# Altium PCB PCB1.PcbDoc (part 1 of 3)
Units mm, origin at the board's own origin, x right, y up, seen from the top; angles counter-clockwise.
Board outline 201 x 61 mm, 2 copper layers (Top Layer, Bottom Layer); 203 components, 113 nets, 551 pads, 592 vias.
Unrouted connection lines stored in the file: 16.
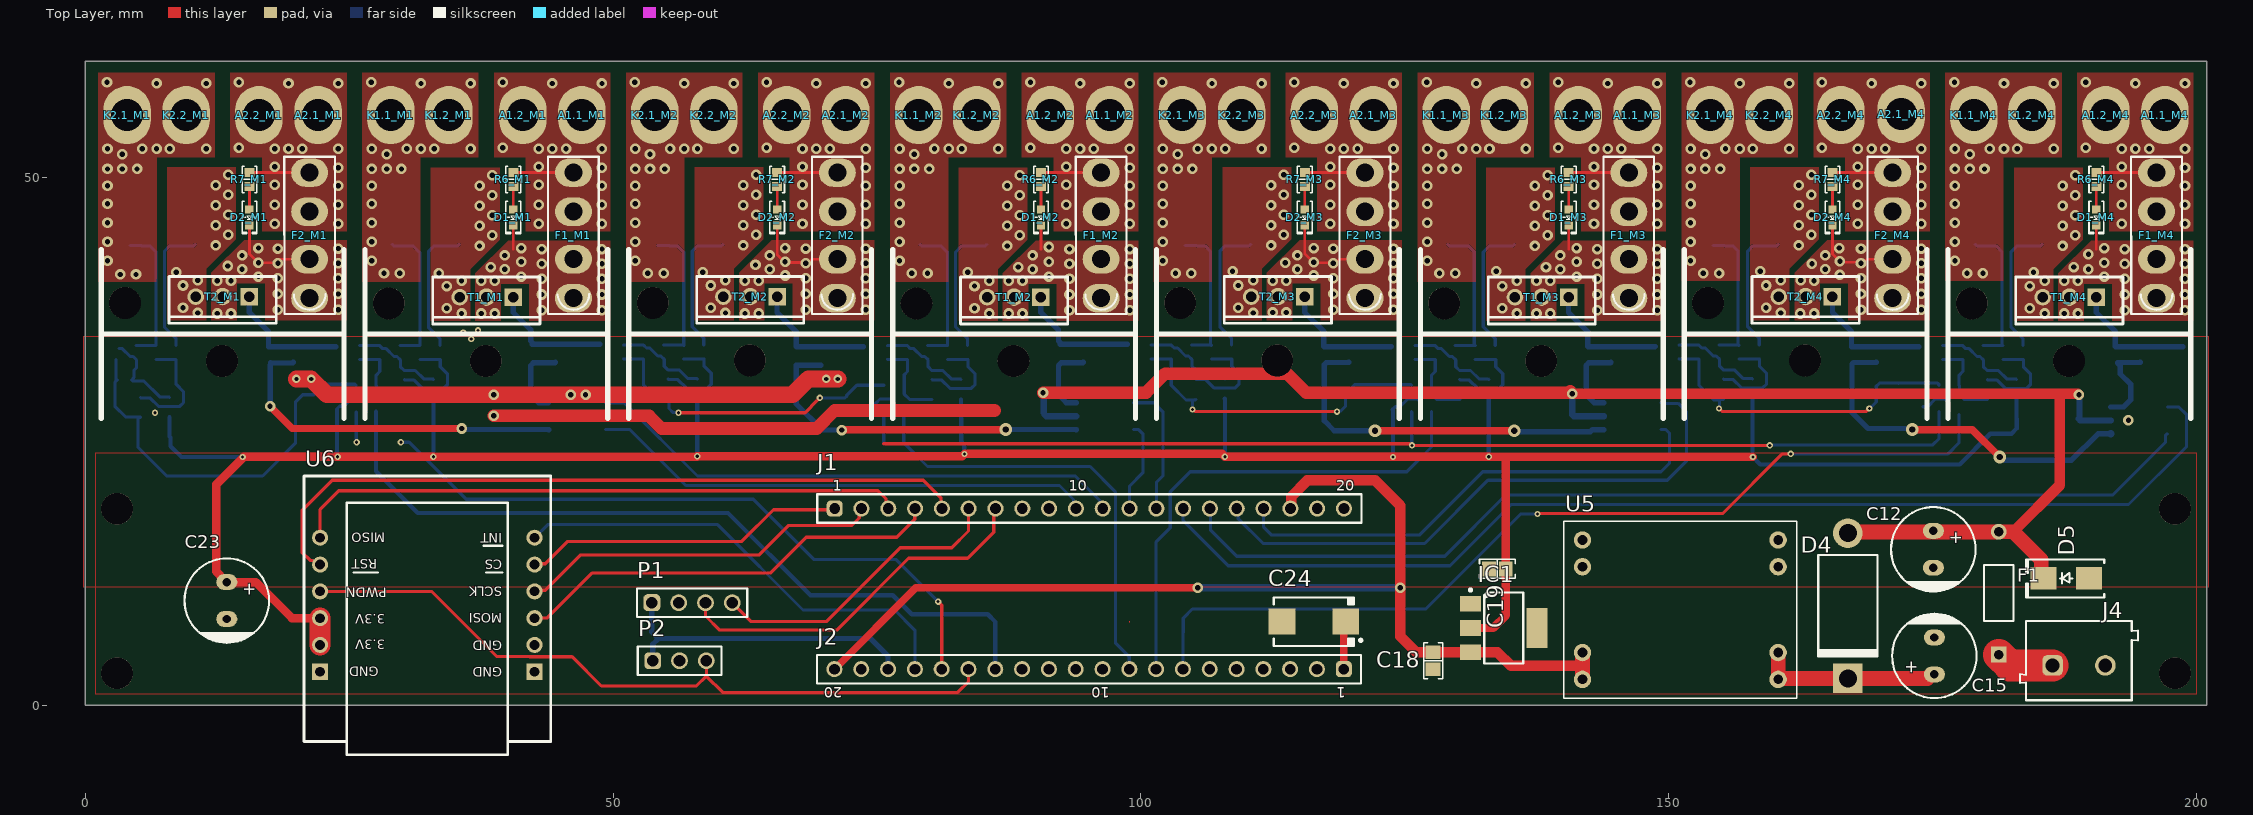
[diagram p0: Top Layer view]
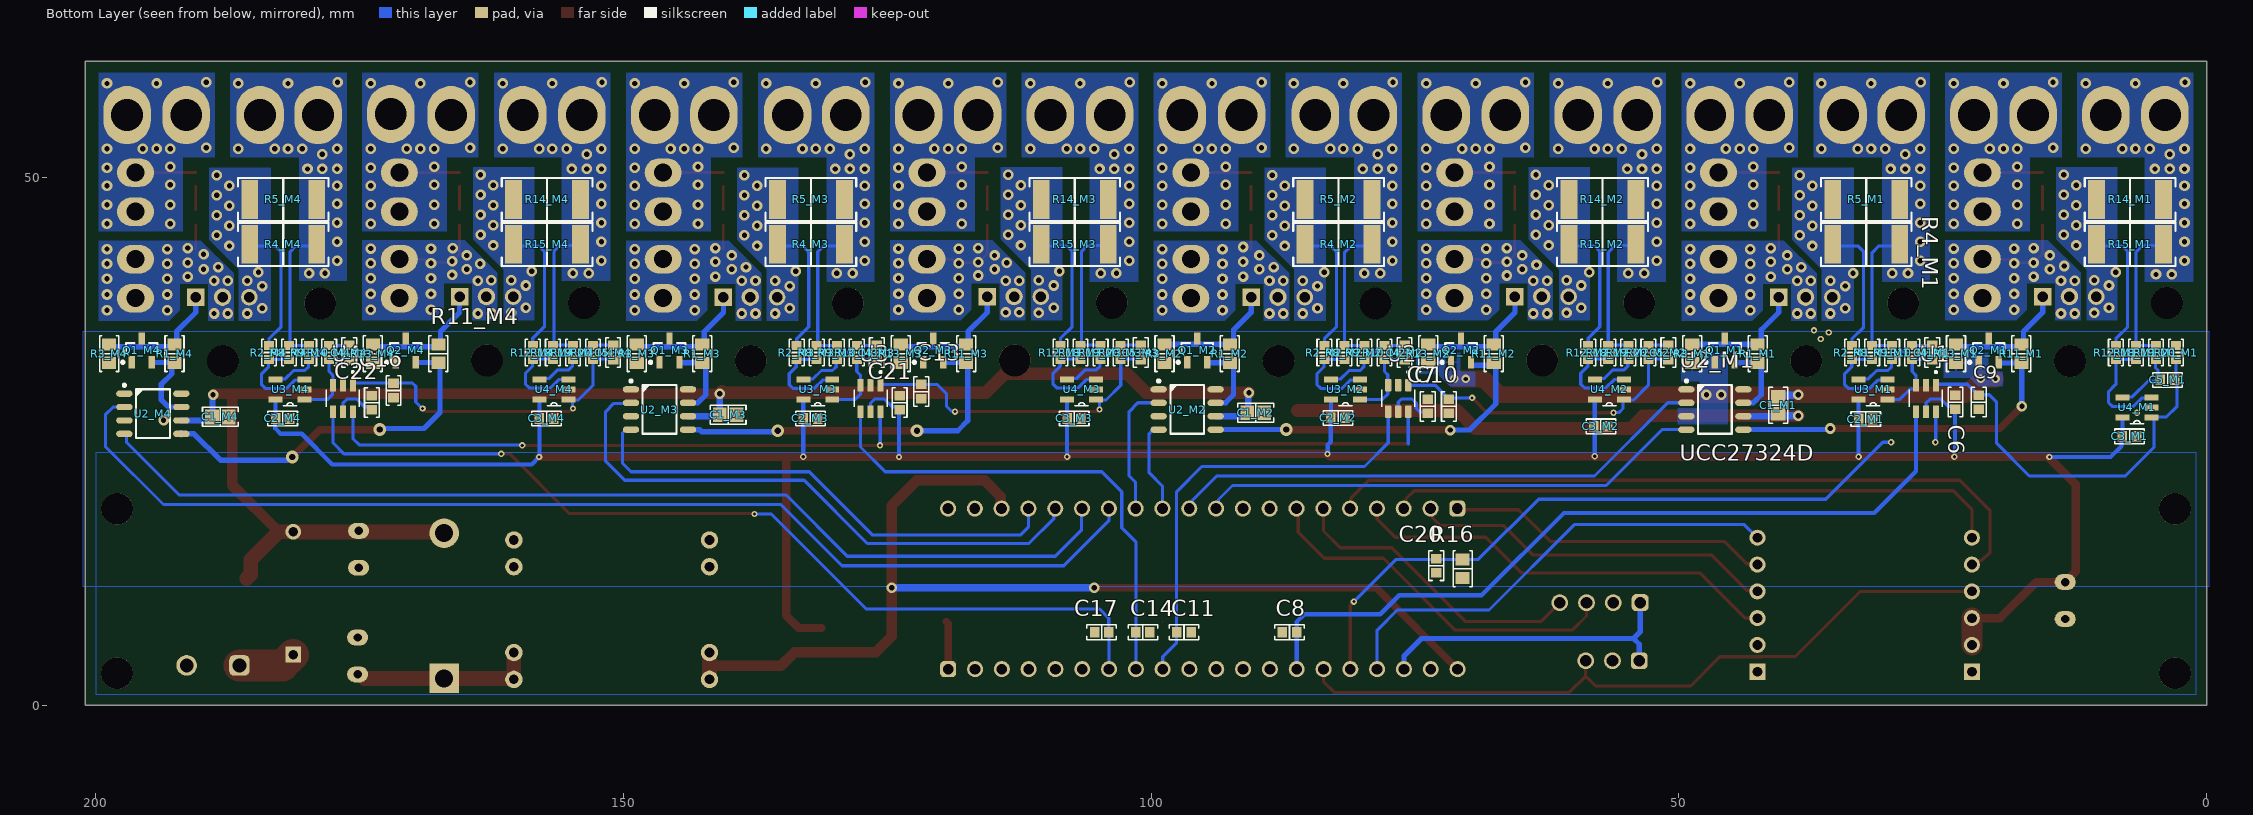
[diagram p1: Bottom Layer view, seen from below]
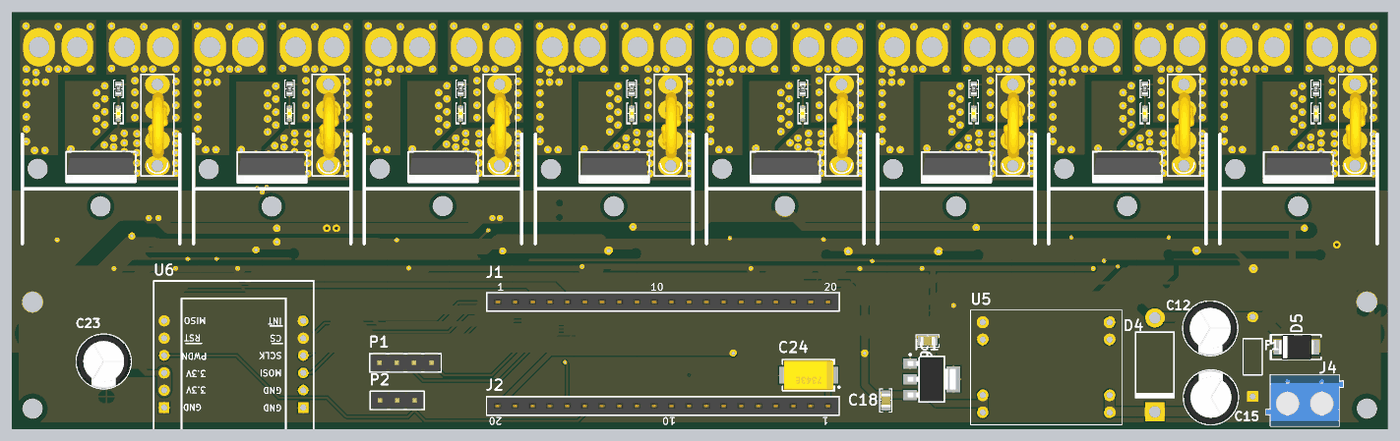
[diagram p3: 3D render of the assembled board from above, using the file's embedded part models]
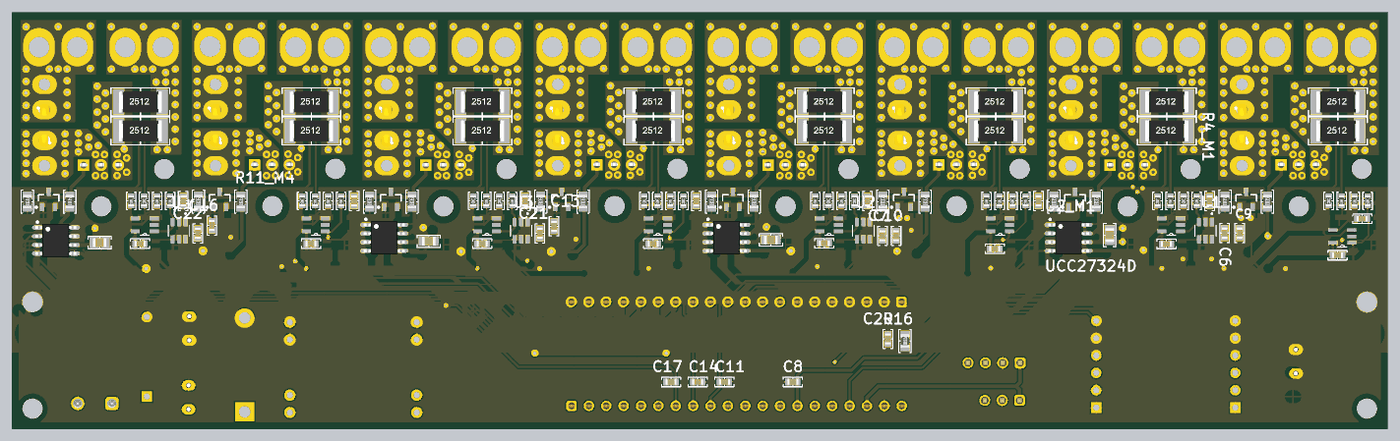
[diagram p4: 3D render of the assembled board from below, using the file's embedded part models]

## Layer stack, top to bottom
Top Solder: solder mask 0.0102, Solder Resist, Dk 3.5
Top Layer: signal copper 0.0356
Dielectric 1: dielectric 0.32, FR-4, Dk 4.8
Bottom Layer: signal copper 0.0356
Bottom Solder: solder mask 0.0102, Solder Resist, Dk 3.5

## Board outline
0,61 201,61 201,0 0,0

## Design rules (kind name [scope] priority, off if disabled: settings)
AcuteAngle [All] p1: minimum=3.50000000000000E+0001 checktracksonly=FALSE
AssemblyTestPointUsage [All] p1: valid=2
BoardOutlineClearance "BoardOutlineClearance 1" [All] p1: gap=0.25 ignorepadtopadclearanceinfootprint=FALSE except(0: Arc-SplitContinuation Track-SplitContinuation SMDPad-SplitContinuation THPad-SplitContinuation Via-SplitContinuation Fill-SplitContinuation Poly-SplitContinuation Region-SplitContinuation Text-SplitContinuation) // Milling
BoardOutlineClearance "BoardOutlineClearance 2" [All] p2: gap=0.4 ignorepadtopadclearanceinfootprint=FALSE except(0: Arc-SplitContinuation Track-SplitContinuation SMDPad-SplitContinuation THPad-SplitContinuation Via-SplitContinuation Fill-SplitContinuation Poly-SplitContinuation Region-SplitContinuation Text-SplitContinuation) // V-Cut
Clearance Clearance_hole7 [(ObjectKind = 'Pad') And (Name = 'Free-7')] p1: gap=0.254 ignorepadtopadclearanceinfootprint=FALSE except(0: Arc-Hole Track-Hole SMDPad-Hole THPad-Hole Via-Hole Fill-Hole Region-Hole Text-Hole; 0.5: Poly-Poly Poly-Region Poly-Text Poly-Hole)
Clearance Clearance_hole8 [(ObjectKind = 'Pad') And (Name = 'Free-8')] p2: gap=0.254 ignorepadtopadclearanceinfootprint=FALSE except(0: Arc-Hole Track-Hole SMDPad-Hole THPad-Hole Via-Hole Fill-Hole Region-Hole Text-Hole; 0.7: Poly-Poly Poly-Region Poly-Text Poly-Hole)
Clearance [All] p3: gap=0.2 ignorepadtopadclearanceinfootprint=FALSE except(0.25: Arc-Hole Track-Hole SMDPad-Hole THPad-Hole Via-Hole Fill-Hole Poly-Hole Region-Hole Text-Hole)
DiffPairsRouting "DiffPairsRouting 1 Oz" [All] p1: maxlimit=0.254 minlimit=0.2 mostfreqgap=0.254 toplayer_minwidth=0.2 toplayer_maxwidth=0.381 toplayer_prefwidth=0.381 bottomlayer_minwidth=0.2 bottomlayer_maxwidth=0.381 bottomlayer_prefwidth=0.381 maxuncoupledlength=12.7
DiffPairsRouting "DiffPairsRouting 1/2 Oz" [All] p2 off: maxlimit=0.254 minlimit=0.1 mostfreqgap=0.254 toplayer_minwidth=0.1 toplayer_maxwidth=0.381 toplayer_prefwidth=0.381 bottomlayer_minwidth=0.1 bottomlayer_maxwidth=0.381 bottomlayer_prefwidth=0.381 maxuncoupledlength=12.7
FabricationTestPointUsage [All] p1: valid=2 allowmultiple=FALSE
HoleSize "Minimum HoleSize" [IsPad] p1: absolutevalues=TRUE maxlimit=5.9 minlimit=0.6 maxpercent=80.000 minpercent=20.000
HoleSize "Minimum HoleSize VIA 1" [IsVia] p2: absolutevalues=TRUE maxlimit=5.9 minlimit=0.3 maxpercent=80.000 minpercent=20.000 // Standart
HoleSize "Minimum HoleSize VIA 2" [IsVia] p3: absolutevalues=TRUE maxlimit=5.9 minlimit=0.2 maxpercent=80.000 minpercent=20.000 // Advance
HoleToHoleClearance Hole2HoleClearance [All] p1: gap=0.25 allowstackedmicrovias=FALSE
MinimumAnnularRing "Minimum AR VIA Standart" [IsVia] p1: minimumring=0.15
MinimumAnnularRing "Minimum AR PAD Standart" [IsPAD] p2: minimumring=0.2
MinimumAnnularRing "Minimum AR VIA Advance" [IsVia] p3: minimumring=0.1
MinimumAnnularRing "Minimum AR PAD Advance" [IsPAD] p4: minimumring=0.15
MinimumSolderMaskSliver "SolderMask Bridge Standart" [All] p1: minsoldermaskwidth=0.15 // All Masks
MinimumSolderMaskSliver "SolderMask Bridge Advance" [All] p2: minsoldermaskwidth=0.1 // Mask LDI
PlaneClearance "PlaneClearance 3 Oz" [All] p1 off: clearance=0.35
PlaneClearance "PlaneClearance 2 Oz" [All] p2 off: clearance=0.3
PlaneClearance "PlaneClearance 1 Oz" [All] p3: clearance=0.2
PlaneClearance "PlaneClearance-1 1/2 Oz" [All] p4 off: clearance=0.2 // Standart
PlaneClearance "PlaneClearance-2 1/2 Oz" [All] p5 off: clearance=0.15 // Advance
PlaneConnect "TermalConnect 3 Oz" [All] p1 off: planeconnectstyle=Relief reliefexpansion=0.2 reliefentries=4 reliefconductorwidth=0.35 reliefairgap=0.35 // Standart
PlaneConnect "TermalConnect 2 Oz" [All] p2 off: planeconnectstyle=Relief reliefexpansion=0.2 reliefentries=4 reliefconductorwidth=0.3 reliefairgap=0.3 // Standart
PlaneConnect "TermalConnect-1 1 Oz" [All] p3: planeconnectstyle=Relief reliefexpansion=0.2 reliefentries=4 reliefconductorwidth=0.2 reliefairgap=0.2 // Standart
PlaneConnect "TermalConnect-2 1 Oz" [All] p4 off: pad.planeconnectstyle=Relief pad.reliefexpansion=0.15 pad.reliefentries=4 pad.reliefconductorwidth=0.2 pad.reliefairgap=0.2 via.planeconnectstyle=Direct via.reliefexpansion=0.15 via.reliefentries=4 via.reliefconductorwidth=0.15 via.reliefairgap=0.15 // Advance
PlaneConnect "TermalConnect-1 1/2 Oz" [All] p5 off: planeconnectstyle=Relief reliefexpansion=0.2 reliefentries=4 reliefconductorwidth=0.2 reliefairgap=0.2 // Standart
PlaneConnect "TermalConnect-2 1/2 Oz" [All] p6 off: pad.planeconnectstyle=Relief pad.reliefexpansion=0.15 pad.reliefentries=4 pad.reliefconductorwidth=0.15 pad.reliefairgap=0.15 via.planeconnectstyle=Direct via.reliefexpansion=0.15 via.reliefentries=4 via.reliefconductorwidth=0.15 via.reliefairgap=0.15 // Advance
PolygonConnect "PolygonConnect 3 Oz" [All] p1 off: thpad.connectstyle=Relief thpad.reliefconductorwidth=0.35 thpad.reliefentries=4 thpad.polygonreliefangle="90 Angle" thpad.airgapwidth=0.35 smdpad.connectstyle=Relief smdpad.reliefconductorwidth=0.35 smdpad.reliefentries=4 smdpad.polygonreliefangle="90 Angle" smdpad.airgapwidth=0.35 via.connectstyle=Direct via.reliefconductorwidth=0.254 via.reliefentries=4 via.polygonreliefangle="90 Angle" via.airgapwidth=0.254
PolygonConnect "PolygonConnect 2 Oz" [All] p2 off: thpad.connectstyle=Relief thpad.reliefconductorwidth=0.3 thpad.reliefentries=4 thpad.polygonreliefangle="90 Angle" thpad.airgapwidth=0.3 smdpad.connectstyle=Relief smdpad.reliefconductorwidth=0.3 smdpad.reliefentries=4 smdpad.polygonreliefangle="90 Angle" smdpad.airgapwidth=0.3 via.connectstyle=Direct via.reliefconductorwidth=0.254 via.reliefentries=4 via.polygonreliefangle="90 Angle" via.airgapwidth=0.254
PolygonConnect "PolygonConnect-1 1 Oz" [All] p3: thpad.connectstyle=Relief thpad.reliefconductorwidth=0.2 thpad.reliefentries=4 thpad.polygonreliefangle="90 Angle" thpad.airgapwidth=0.2 smdpad.connectstyle=Relief smdpad.reliefconductorwidth=0.2 smdpad.reliefentries=4 smdpad.polygonreliefangle="90 Angle" smdpad.airgapwidth=0.2 via.connectstyle=Direct via.reliefconductorwidth=0.254 via.reliefentries=4 via.polygonreliefangle="90 Angle" via.airgapwidth=0.254 // Standart
PolygonConnect "PolygonConnect-2 1 Oz" [All] p4 off: thpad.connectstyle=Relief thpad.reliefconductorwidth=0.15 thpad.reliefentries=4 thpad.polygonreliefangle="90 Angle" thpad.airgapwidth=0.15 smdpad.connectstyle=Relief smdpad.reliefconductorwidth=0.15 smdpad.reliefentries=4 smdpad.polygonreliefangle="90 Angle" smdpad.airgapwidth=0.15 via.connectstyle=Direct via.reliefconductorwidth=0.254 via.reliefentries=4 via.polygonreliefangle="90 Angle" via.airgapwidth=0.254 // Advance
PolygonConnect "PolygonConnect-1 1/2 Oz" [All] p5 off: thpad.connectstyle=Relief thpad.reliefconductorwidth=0.15 thpad.reliefentries=4 thpad.polygonreliefangle="90 Angle" thpad.airgapwidth=0.2 smdpad.connectstyle=Relief smdpad.reliefconductorwidth=0.2 smdpad.reliefentries=4 smdpad.polygonreliefangle="90 Angle" smdpad.airgapwidth=0.2 via.connectstyle=Direct via.reliefconductorwidth=0.254 via.reliefentries=4 via.polygonreliefangle="90 Angle" via.airgapwidth=0.254 // Standart
PolygonConnect "PolygonConnect-2 1/2 Oz" [All] p6 off: thpad.connectstyle=Relief thpad.reliefconductorwidth=0.125 thpad.reliefentries=4 thpad.polygonreliefangle="90 Angle" thpad.airgapwidth=0.15 smdpad.connectstyle=Relief smdpad.reliefconductorwidth=0.125 smdpad.reliefentries=4 smdpad.polygonreliefangle="90 Angle" smdpad.airgapwidth=0.15 via.connectstyle=Direct via.reliefconductorwidth=0.254 via.reliefentries=4 via.polygonreliefangle="90 Angle" via.airgapwidth=0.254 // Advance
RoutingCorners [All] p1 off: cornerstyle=45-Degree minsetback=2.54 maxsetback=2.54
RoutingVias [All] p1: holewidth=0.3 width=0.6 viastyle="Through Hole" minholewidth=0.2 minwidth=0.4 maxholewidth=5.9 maxwidth=6.4
SilkToSilkClearance Silk2SilkClearance [All] p1 off: silktosilkclearance=0.15
SilkToSolderMaskClearance Silk2SolderMaskClearance [IsPad] p1 off: minsilkscreentomaskgap=0.15 clearancetoexposedcopper=TRUE
SolderMaskExpansion SolderMaskExpansion-1 [All] p1: expansion=0.05 istentingtop=FALSE // Standart
SolderMaskExpansion "SolderMaskExpansion LDI" [All] p2: expansion=0.025 istentingtop=FALSE // Advance
Width "Width 3 Oz" [All] p1 off: maxlimit=10 minlimit=0.35 preferedwidth=0.4 checkconnectedcopper=TRUE
Width "Width 2 Oz" [All] p2 off: maxlimit=10 minlimit=0.3 preferedwidth=0.35 minimp=50.000000 maximp=50.000000 favimp=50.000000 checkconnectedcopper=TRUE
Width "Width 1 Oz" [All] p3: maxlimit=10 minlimit=0.15 preferedwidth=0.2 checkconnectedcopper=TRUE
Width "Width 1/2 Oz" [All] p4 off: maxlimit=10 minlimit=0.1 preferedwidth=0.125 checkconnectedcopper=TRUE
19 further rules are at their usual default settings.

## Classes and differential pairs
component class Sheet1: C6 C7 C8 C9 C10 C11 C12 C13 C14 C15 C16 C17 C18 C19 C20 C21 C22 C23 C24 D4 D5 F1 IC1 J1 J2 J4 P1 P2 R16 "STM32F4x1CxU6 Part" U1 U2 U3 U4 U5 U6
component class M4: A1.1_M4 A1.2_M4 A2.1_M4 A2.2_M4 C1_M4 C2_M4 C3_M4 C4_M4 C5_M4 D1_M4 D2_M4 F1_M4 F2_M4 K1.1_M4 K1.2_M4 K2.1_M4 K2.2_M4 Q1_M4 Q2_M4 R1_M4 R2_M4 R3_M4 R4_M4 R5_M4 R6_M4 R7_M4 R8_M4 R9_M4 R10_M4 R11_M4 R12_M4 R13_M4 R14_M4 R15_M4 R18_M4 R19_M4 R20_M4 T1_M4 T2_M4 U2_M4 U3_M4 U4_M4
component class M3: A1.1_M3 A1.2_M3 A2.1_M3 A2.2_M3 C1_M3 C2_M3 C3_M3 C4_M3 C5_M3 D1_M3 D2_M3 F1_M3 F2_M3 K1.1_M3 K1.2_M3 K2.1_M3 K2.2_M3 Q1_M3 Q2_M3 R1_M3 R2_M3 R3_M3 R4_M3 R5_M3 R6_M3 R7_M3 R8_M3 R9_M3 R10_M3 R11_M3 R12_M3 R13_M3 R14_M3 R15_M3 R18_M3 R19_M3 R20_M3 T1_M3 T2_M3 U2_M3 U3_M3 U4_M3
component class M2: A1.1_M2 A1.2_M2 A2.1_M2 A2.2_M2 C1_M2 C2_M2 C3_M2 C4_M2 C5_M2 D1_M2 D2_M2 F1_M2 F2_M2 K1.1_M2 K1.2_M2 K2.1_M2 K2.2_M2 Q1_M2 Q2_M2 R1_M2 R2_M2 R3_M2 R4_M2 R5_M2 R6_M2 R7_M2 R8_M2 R9_M2 R10_M2 R11_M2 R12_M2 R13_M2 R14_M2 R15_M2 R18_M2 R19_M2 R20_M2 T1_M2 T2_M2 U2_M2 U3_M2 U4_M2
component class M1: A1.1_M1 A1.2_M1 A2.1_M1 A2.2_M1 C1_M1 C2_M1 C3_M1 C4_M1 C5_M1 D1_M1 D2_M1 F1_M1 F2_M1 K1.1_M1 K1.2_M1 K2.1_M1 K2.2_M1 Q1_M1 Q2_M1 R1_M1 R2_M1 R3_M1 R4_M1 R5_M1 R6_M1 R7_M1 R8_M1 R9_M1 R10_M1 R11_M1 R12_M1 R13_M1 R14_M1 R15_M1 R18_M1 R19_M1 R20_M1 T1_M1 T2_M1 U2_M1 U3_M1 U4_M1
channel class Sheet2: M1 M2 M3 M4

## Components (designator, comment, footprint, x,y, rotation, side; value= is the part's Value field where it differs from the comment)
A1.1_M1 "Plated Hole" MTG240_400#1 47.05,55.9 r0 top (schematic designator A1.1)
A1.1_M2 "Plated Hole" MTG240_400#2 97.05,55.15 r0 top (schematic designator A1.1)
A1.1_M3 "Plated Hole" MTG240_400#2 147.05,55.15 r0 top (schematic designator A1.1)
A1.1_M4 "Plated Hole" MTG240_400#2 197.05,55.15 r0 top (schematic designator A1.1)
A1.2_M1 "Plated Hole" MTG240_400#1 41.45,55.9 r0 top (schematic designator A1.2)
A1.2_M2 "Plated Hole" MTG240_400#2 91.45,55.15 r0 top (schematic designator A1.2)
A1.2_M3 "Plated Hole" MTG240_400#2 141.45,55.15 r0 top (schematic designator A1.2)
A1.2_M4 "Plated Hole" MTG240_400#2 191.45,55.15 r0 top (schematic designator A1.2)
A2.1_M1 "Plated Hole" MTG240_400#1 22.05,55.9 r0 top (schematic designator A2.1)
A2.1_M2 "Plated Hole" MTG240_400#2 72.05,55.15 r0 top (schematic designator A2.1)
A2.1_M3 "Plated Hole" MTG240_400#2 122.05,55.15 r0 top (schematic designator A2.1)
A2.1_M4 "Plated Hole" MTG240_400#2 172.05,55.25 r0 top (schematic designator A2.1)
A2.2_M1 "Plated Hole" MTG240_400#1 16.45,55.9 r0 top (schematic designator A2.2)
A2.2_M2 "Plated Hole" MTG240_400#2 66.45,55.15 r0 top (schematic designator A2.2)
A2.2_M3 "Plated Hole" MTG240_400#2 116.45,55.15 r0 top (schematic designator A2.2)
A2.2_M4 "Plated Hole" MTG240_400#2 166.35,55.15 r0 top (schematic designator A2.2)
C1_M1 "2.2 µF" "CAP 0805_2012" 40.6,28.4 r270 bottom (schematic designator C1)
C1_M2 "2.2 µF" "CAP 0805_2012" 90.1,27.7 r0 bottom (schematic designator C1)
C1_M3 "2.2 µF" "CAP 0805_2012" 140.1,27.5 r0 bottom (schematic designator C1)
C1_M4 "2.2 µF" "CAP 0805_2012" 188.2,27.3 r0 bottom (schematic designator C1)
C2_M1 "1000 pF" "CAP 0603_1608" 32.3,27.1 r0 bottom (schematic designator C2)
C2_M2 "1000 pF" "CAP 0603_1608" 82.3,27.2 r0 bottom (schematic designator C2)
C2_M3 "1000 pF" "CAP 0603_1608" 132.3,27.15 r0 bottom (schematic designator C2)
C2_M4 "1000 pF" "CAP 0603_1608" 182.3,27.15 r0 bottom (schematic designator C2)
C3_M1 "1000 pF" "CAP 0603_1608" 7.3,25.45 r0 bottom (schematic designator C3)
C3_M2 "1000 pF" "CAP 0603_1608" 57.4,26.4 r0 bottom (schematic designator C3)
C3_M3 "1000 pF" "CAP 0603_1608" 107.3,27.15 r0 bottom (schematic designator C3)
C3_M4 "1000 pF" "CAP 0603_1608" 157.3,27.15 r0 bottom (schematic designator C3)
C4_M1 "6800 pF" "CAP 0603_1608" 26,33.4 r270 bottom (schematic designator C4)
C4_M2 "6800 pF" "CAP 0603_1608" 76,33.4 r270 bottom (schematic designator C4)
C4_M3 "6800 pF" "CAP 0603_1608" 126,33.4 r270 bottom (schematic designator C4)
C4_M4 "6800 pF" "CAP 0603_1608" 176,33.4 r270 bottom (schematic designator C4)
C5_M1 "6800 pF" "CAP 0603_1608" 3.7,30.8 r180 bottom (schematic designator C5)
C5_M2 "6800 pF" "CAP 0603_1608" 51,33.4 r270 bottom (schematic designator C5)
C5_M3 "6800 pF" "CAP 0603_1608" 101,33.4 r270 bottom (schematic designator C5)
C5_M4 "6800 pF" "CAP 0603_1608" 151,33.4 r270 bottom (schematic designator C5)
C6 "1000 pF" "CAP 0603_1608" 23.8,28.7 r270 bottom
C7 "1000 pF" "CAP 0603_1608" 73.8,28.3 r270 bottom
C8 "0.1 µF" "CAP 0603_1608" 86.9,6.9 r0 bottom
C9 "0.1 µF" "CAP 0603_1608" 21.6,28.7 r270 bottom
C10 "0.1 µF" "CAP 0603_1608" 71.8,28.3 r270 bottom
C11 "0.1 µF" "CAP 0603_1608" 96.9,6.9 r180 bottom
C12 "220 µF" "CAP AL TH D8 L3.5 H12.5" 175.1,14.75 r270 top
C13 "0.1 µF" "CAP 0603_1608" 121.8,29.7 r270 bottom
C14 "0.1 µF" "CAP 0603_1608" 100.8,6.9 r0 bottom
C15 "220 µF" "CAP AL TH D8 L3.5 H12.5" 175.2,4.65 r90 top
C16 "0.1 µF" "CAP 0603_1608" 171.8,29.8 r90 bottom
C17 "0.1 µF" "CAP 0603_1608" 104.7,6.9 r180 bottom
C18 "1 µF" "CAP 0805_2012" 127.7,4.2 r90 top
C19 "4.7µF" "CAP 0805_2012" 133.8,12.9 r0 top
C20 "0.1 µF" "CAP 0603_1608" 73,13.2 r270 bottom
C21 "1000 pF" "CAP 0603_1608" 123.85,28.65 r270 bottom
C22 "1000 pF" "CAP 0603_1608" 173.85,28.65 r270 bottom
C23 "470 µF" "CAP AL TH D8 L3.5 H12.5" 13.4,9.9 r270 top
C24 "330µF" "CAP POL 2917_7343" 116.4,7.9 r180 top
D1_M1 "Yellow" "LED 0603_1608 YELLOW" 40.55,46.2 r270 top (schematic designator D1)
D1_M2 "Yellow" "LED 0603_1608 YELLOW" 90.55,46.2 r270 top (schematic designator D1)
D1_M3 "Yellow" "LED 0603_1608 YELLOW" 140.55,46.2 r270 top (schematic designator D1)
D1_M4 "Yellow" "LED 0603_1608 YELLOW" 190.55,46.2 r270 top (schematic designator D1)
D2_M1 "Yellow" "LED 0603_1608 YELLOW" 15.55,46.2 r270 top (schematic designator D2)
D2_M2 "Yellow" "LED 0603_1608 YELLOW" 65.55,46.2 r270 top (schematic designator D2)
D2_M3 "Yellow" "LED 0603_1608 YELLOW" 115.55,46.2 r270 top (schematic designator D2)
D2_M4 "Yellow" "LED 0603_1608 YELLOW" 165.55,46.2 r270 top (schematic designator D2)
D4 "Diode 1N5400" DO-201AD 167,9.4 r270 top
D5 "SMBJ120A" "DO214AA SMB" 187.7,12 r180 top
F1 "Fuse 1" PIN-W2/E2.8 181.3,10.6 r90 top
F1_M1 "Value" "FUSR_LITTELFUSE_RHEF100 - duplicate" 46.25,44.5 r90 top (schematic designator F1)
F1_M2 "Value" "FUSR_LITTELFUSE_RHEF100 - duplicate" 96.25,44.5 r90 top (schematic designator F1)
F1_M3 "Value" "FUSR_LITTELFUSE_RHEF100 - duplicate" 146.25,44.5 r90 top (schematic designator F1)
F1_M4 "Value" "FUSR_LITTELFUSE_RHEF100 - duplicate" 196.25,44.5 r90 top (schematic designator F1)
F2_M1 "Value" "FUSR_LITTELFUSE_RHEF100 - duplicate" 21.25,44.5 r90 top (schematic designator F2)
F2_M2 "Value" "FUSR_LITTELFUSE_RHEF100 - duplicate" 71.25,44.5 r90 top (schematic designator F2)
F2_M3 "Value" "FUSR_LITTELFUSE_RHEF100 - duplicate" 121.25,44.5 r90 top (schematic designator F2)
F2_M4 "Value" "FUSR_LITTELFUSE_RHEF100 - duplicate" 171.25,44.5 r90 top (schematic designator F2)
IC1 "LDL1117S33R" "ST SOT-223" 134.4,7.3 r0 top
J1 "61302011821" 61302011821 95.13,18.62 r0 top
J2 "61302011821" 61302011821 95.11,3.4 r180 top
J4 "691102710002" 691102710002 188.9,4.2 r0 top
K1.1_M1 "Plated Hole" MTG240_400#1 28.95,55.9 r0 top (schematic designator K1.1)
K1.1_M2 "Plated Hole" MTG240_400#2 78.95,55.15 r0 top (schematic designator K1.1)
K1.1_M3 "Plated Hole" MTG240_400#2 128.95,55.15 r0 top (schematic designator K1.1)
K1.1_M4 "Plated Hole" MTG240_400#2 178.95,55.15 r0 top (schematic designator K1.1)
K1.2_M1 "Plated Hole" MTG240_400#1 34.45,55.9 r0 top (schematic designator K1.2)
K1.2_M2 "Plated Hole" MTG240_400#2 84.45,55.15 r0 top (schematic designator K1.2)
K1.2_M3 "Plated Hole" MTG240_400#2 134.45,55.15 r0 top (schematic designator K1.2)
K1.2_M4 "Plated Hole" MTG240_400#2 184.45,55.15 r0 top (schematic designator K1.2)
K2.1_M1 "Plated Hole" MTG240_400#1 3.95,55.9 r0 top (schematic designator K2.1)
K2.1_M2 "Plated Hole" MTG240_400#2 53.95,55.15 r0 top (schematic designator K2.1)
K2.1_M3 "Plated Hole" MTG240_400#2 103.95,55.15 r0 top (schematic designator K2.1)
K2.1_M4 "Plated Hole" MTG240_400#2 153.95,55.15 r0 top (schematic designator K2.1)
K2.2_M1 "Plated Hole" MTG240_400#1 9.55,55.9 r0 top (schematic designator K2.2)
K2.2_M2 "Plated Hole" MTG240_400#2 59.55,55.15 r0 top (schematic designator K2.2)
K2.2_M3 "Plated Hole" MTG240_400#2 109.55,55.15 r0 top (schematic designator K2.2)
K2.2_M4 "Plated Hole" MTG240_400#2 159.55,55.15 r0 top (schematic designator K2.2)
P1 "61300411121" 61300411121 57.49,9.7 r0 top
P2 "61300311121" 61300311121 56.3,4.2 r0 top
Q1_M1 "FMMT718TA" SOT-23B_N 45.65,33.6 r90 bottom (schematic designator Q1)
Q1_M2 "FMMT718TA" SOT-23B_N 95.65,33.6 r90 bottom (schematic designator Q1)
Q1_M3 "FMMT718TA" SOT-23B_N 145.65,33.6 r90 bottom (schematic designator Q1)
Q1_M4 "FMMT718TA" SOT-23B_N 195.65,33.6 r90 bottom (schematic designator Q1)
Q2_M1 "FMMT718TA" SOT-23B_N 20.65,33.6 r90 bottom (schematic designator Q2)
Q2_M2 "FMMT718TA" SOT-23B_N 70.65,33.6 r90 bottom (schematic designator Q2)
Q2_M3 "FMMT718TA" SOT-23B_N 120.65,33.6 r90 bottom (schematic designator Q2)
Q2_M4 "FMMT718TA" SOT-23B_N 170.65,33.6 r90 bottom (schematic designator Q2)
R1_M1 "3 Ohms" "RES 0805_2012" 42.55,33.3 r90 bottom (schematic designator R1)
R1_M2 "3 Ohms" "RES 0805_2012" 92.55,33.3 r90 bottom (schematic designator R1)
R1_M3 "3 Ohms" "RES 0805_2012" 142.55,33.3 r90 bottom (schematic designator R1)
R1_M4 "3 Ohms" "RES 0805_2012" 192.55,33.3 r90 bottom (schematic designator R1)
R2_M1 "5.1 kOhms" "RES 0603_1608" 33.6,33.4 r270 bottom (schematic designator R2)
R2_M2 "5.1 kOhms" "RES 0603_1608" 83.6,33.4 r270 bottom (schematic designator R2)
R2_M3 "5.1 kOhms" "RES 0603_1608" 133.6,33.4 r270 bottom (schematic designator R2)
R2_M4 "5.1 kOhms" "RES 0603_1608" 183.6,33.4 r270 bottom (schematic designator R2)
R3_M1 "10 kOhms" "RES 0805_2012" 48.75,33.3 r90 bottom (schematic designator R3)
R3_M2 "10 kOhms" "RES 0805_2012" 98.75,33.3 r90 bottom (schematic designator R3)
R3_M3 "10 kOhms" "RES 0805_2012" 148.75,33.3 r90 bottom (schematic designator R3)
R3_M4 "10 kOhms" "RES 0805_2012" 198.75,33.3 r90 bottom (schematic designator R3)
R4_M1 "10 mOhms" "RES 2512_6432" 32.25,43.65 r180 bottom (schematic designator R4)
R4_M2 "10 mOhms" "RES 2512_6432" 82.25,43.65 r180 bottom (schematic designator R4)
R4_M3 "10 mOhms" "RES 2512_6432" 132.25,43.65 r180 bottom (schematic designator R4)
R4_M4 "10 mOhms" "RES 2512_6432" 182.25,43.65 r180 bottom (schematic designator R4)
R5_M1 "10 mOhms" "RES 2512_6432" 32.25,47.9 r180 bottom (schematic designator R5)
R5_M2 "10 mOhms" "RES 2512_6432" 82.25,47.9 r180 bottom (schematic designator R5)
R5_M3 "10 mOhms" "RES 2512_6432" 132.25,47.9 r180 bottom (schematic designator R5)
R5_M4 "10 mOhms" "RES 2512_6432" 182.25,47.9 r180 bottom (schematic designator R5)
R6_M1 "4.7 kOhms" "RES 0603_1608" 40.55,49.8 r90 top (schematic designator R6)
R6_M2 "4.7 kOhms" "RES 0603_1608" 90.55,49.8 r90 top (schematic designator R6)
R6_M3 "4.7 kOhms" "RES 0603_1608" 140.55,49.8 r90 top (schematic designator R6)
R6_M4 "4.7 kOhms" "RES 0603_1608" 190.55,49.8 r90 top (schematic designator R6)
R7_M1 "4.7 kOhms" "RES 0603_1608" 15.55,49.8 r90 top (schematic designator R7)
R7_M2 "4.7 kOhms" "RES 0603_1608" 65.55,49.8 r90 top (schematic designator R7)
R7_M3 "4.7 kOhms" "RES 0603_1608" 115.55,49.8 r90 top (schematic designator R7)
R7_M4 "4.7 kOhms" "RES 0603_1608" 165.55,49.8 r90 top (schematic designator R7)
R8_M1 "249 kOhms" "RES 0603_1608" 31.7,33.4 r270 bottom (schematic designator R8)
R8_M2 "249 kOhms" "RES 0603_1608" 81.7,33.4 r270 bottom (schematic designator R8)
R8_M3 "249 kOhms" "RES 0603_1608" 131.7,33.4 r270 bottom (schematic designator R8)
R8_M4 "249 kOhms" "RES 0603_1608" 181.7,33.4 r270 bottom (schematic designator R8)
R9_M1 "5.1 kOhms" "RES 0603_1608" 29.8,33.4 r270 bottom (schematic designator R9)
R9_M2 "5.1 kOhms" "RES 0603_1608" 79.8,33.4 r270 bottom (schematic designator R9)
R9_M3 "5.1 kOhms" "RES 0603_1608" 129.8,33.4 r270 bottom (schematic designator R9)
R9_M4 "5.1 kOhms" "RES 0603_1608" 179.8,33.4 r270 bottom (schematic designator R9)
R10_M1 "249 kOhms" "RES 0603_1608" 27.9,33.4 r270 bottom (schematic designator R10)
R10_M2 "249 kOhms" "RES 0603_1608" 77.9,33.4 r270 bottom (schematic designator R10)
R10_M3 "249 kOhms" "RES 0603_1608" 127.9,33.4 r270 bottom (schematic designator R10)
R10_M4 "249 kOhms" "RES 0603_1608" 177.9,33.4 r270 bottom (schematic designator R10)
R11_M1 "3 Ohms" "RES 0805_2012" 17.55,33.3 r90 bottom (schematic designator R11)
R11_M2 "3 Ohms" "RES 0805_2012" 67.55,33.3 r90 bottom (schematic designator R11)
R11_M3 "3 Ohms" "RES 0805_2012" 117.55,33.3 r90 bottom (schematic designator R11)
R11_M4 "3 Ohms" "RES 0805_2012" 167.55,33.3 r90 bottom (schematic designator R11)
R12_M1 "5.1 kOhms" "RES 0603_1608" 8.6,33.4 r270 bottom (schematic designator R12)
R12_M2 "5.1 kOhms" "RES 0603_1608" 58.6,33.4 r270 bottom (schematic designator R12)
R12_M3 "5.1 kOhms" "RES 0603_1608" 108.6,33.4 r270 bottom (schematic designator R12)
R12_M4 "5.1 kOhms" "RES 0603_1608" 158.6,33.4 r270 bottom (schematic designator R12)
R13_M1 "10 kOhms" "RES 0805_2012" 23.75,33.3 r90 bottom (schematic designator R13)
R13_M2 "10 kOhms" "RES 0805_2012" 73.75,33.3 r90 bottom (schematic designator R13)
R13_M3 "10 kOhms" "RES 0805_2012" 123.75,33.3 r90 bottom (schematic designator R13)
R13_M4 "10 kOhms" "RES 0805_2012" 173.75,33.3 r90 bottom (schematic designator R13)
R14_M1 "10 mOhms" "RES 2512_6432" 7.25,47.9 r180 bottom (schematic designator R14)
R14_M2 "10 mOhms" "RES 2512_6432" 57.25,47.9 r180 bottom (schematic designator R14)
R14_M3 "10 mOhms" "RES 2512_6432" 107.25,47.9 r180 bottom (schematic designator R14)
R14_M4 "10 mOhms" "RES 2512_6432" 157.25,47.9 r180 bottom (schematic designator R14)
R15_M1 "10 mOhms" "RES 2512_6432" 7.25,43.65 r180 bottom (schematic designator R15)
R15_M2 "10 mOhms" "RES 2512_6432" 57.25,43.65 r180 bottom (schematic designator R15)
R15_M3 "10 mOhms" "RES 2512_6432" 107.25,43.65 r180 bottom (schematic designator R15)
R15_M4 "10 mOhms" "RES 2512_6432" 157.25,43.65 r180 bottom (schematic designator R15)
R16 "10 kOhms" "RES 0805_2012" 70.5,12.9 r90 bottom
R18_M1 "249 kOhms" "RES 0603_1608" 6.7,33.4 r270 bottom (schematic designator R18)
R18_M2 "249 kOhms" "RES 0603_1608" 56.7,33.4 r270 bottom (schematic designator R18)
R18_M3 "249 kOhms" "RES 0603_1608" 106.7,33.4 r270 bottom (schematic designator R18)
R18_M4 "249 kOhms" "RES 0603_1608" 156.7,33.4 r270 bottom (schematic designator R18)
R19_M1 "5.1 kOhms" "RES 0603_1608" 4.8,33.4 r270 bottom (schematic designator R19)
R19_M2 "5.1 kOhms" "RES 0603_1608" 54.8,33.4 r270 bottom (schematic designator R19)
R19_M3 "5.1 kOhms" "RES 0603_1608" 104.8,33.4 r270 bottom (schematic designator R19)
R19_M4 "5.1 kOhms" "RES 0603_1608" 154.8,33.4 r270 bottom (schematic designator R19)
R20_M1 "249 kOhms" "RES 0603_1608" 2.9,33.4 r270 bottom (schematic designator R20)
R20_M2 "249 kOhms" "RES 0603_1608" 52.9,33.4 r270 bottom (schematic designator R20)
R20_M3 "249 kOhms" "RES 0603_1608" 102.9,33.4 r270 bottom (schematic designator R20)
R20_M4 "249 kOhms" "RES 0603_1608" 152.9,33.4 r270 bottom (schematic designator R20)
T1_M1 "" TO-220 38,38.65 r180 top (schematic designator T1)
T1_M2 "" TO-220 88,38.65 r180 top (schematic designator T1)
T1_M3 "" TO-220 138,38.65 r180 top (schematic designator T1)
T1_M4 "" TO-220 188,38.65 r180 top (schematic designator T1)
T2_M1 "" TO-220 13,38.7 r180 top (schematic designator T2)
T2_M2 "" TO-220 63,38.7 r180 top (schematic designator T2)
T2_M3 "" TO-220 113,38.7 r180 top (schematic designator T2)
T2_M4 "" TO-220 163,38.7 r180 top (schematic designator T2)
U1 "SN74LVC1G3157DBVR" SOT95P280X145-6N 26.6,29.05 r270 bottom
U2 "SN74LVC1G3157DBVR" SOT95P280X145-6N 76.6,29.05 r270 bottom
U2_M1 "UCC27324D" 8-SOIC 46.6,28 r180 bottom (schematic designator U2)
U2_M2 "UCC27324D" 8-SOIC 96.6,28 r180 bottom (schematic designator U2)
U2_M3 "UCC27324D" 8-SOIC 146.6,28 r180 bottom (schematic designator U2)
U2_M4 "UCC27324D" 8-SOIC 194.6,27.6 r180 bottom (schematic designator U2)
U3 "SN74LVC1G3157DBVR" SOT95P280X145-6N 126.6,29.05 r270 bottom
U3_M1 "MCP606T-I/OT" SOT95P270X145-5N 31.6,29.9 r0 bottom (schematic designator U3)
U3_M2 "MCP606T-I/OT" SOT95P270X145-5N 81.6,29.9 r0 bottom (schematic designator U3)
U3_M3 "MCP606T-I/OT" SOT95P270X145-5N 131.6,29.9 r0 bottom (schematic designator U3)
U3_M4 "MCP606T-I/OT" SOT95P270X145-5N 181.6,29.9 r0 bottom (schematic designator U3)
U4 "SN74LVC1G3157DBVR" SOT95P280X145-6N 176.6,29.05 r270 bottom
U4_M1 "MCP606T-I/OT" SOT95P270X145-5N 6.6,28.2 r0 bottom (schematic designator U4)
U4_M2 "MCP606T-I/OT" SOT95P270X145-5N 56.6,29.9 r0 bottom (schematic designator U4)
U4_M3 "MCP606T-I/OT" SOT95P270X145-5N 106.6,29.9 r0 bottom (schematic designator U4)
U4_M4 "MCP606T-I/OT" SOT95P270X145-5N 156.6,29.9 r0 bottom (schematic designator U4)
U5 "mp1584_m" modul 162.178,17.418 r180 top
U6 "W5500_lite" "VAD USR-ES1 W5500" 32.4,9.5 r0 top

## Footprints (in the part's own frame and the unit in brackets; to place one, negate y for a bottom-side part, rotate by r counter-clockwise, add the part's x,y. Pads: shape width x height; smd on the part's side, far side on the other; paste and mask are expansions set on the pad)
8-SOIC [mm] "pitch 1.27 mm"
  rrect100% 1.55x0.6 smd: 1(-2.7,1.905) 2(-2.7,0.635) 3(-2.7,-0.635) 4(-2.7,-1.905) 5(2.7,-1.905) 6(2.7,-0.635) 7(2.7,0.635) 8(2.7,1.905)
  round 0.7 on Mech1: 28(-2.395,1.8)
  silkscreen extent -2.82,-2.3 1.6,2.82, body extent -3,-2.45 3,2.45, height 1.75
61300311121 [mm] "Pin Header, pitch 2.54 mm, THT, Vertical, single row, 3p"
  rrect50% 1.6x1.6 hole 1.1: 1(-2.54,0)
  round 1.6 hole 1.1: 2(0,0) 3(2.54,0)
  silkscreen extent -3.96,-1.34 3.96,1.35, body extent -3.81,-1.27 3.81,1.27, height 8.57
61300411121 [mm] "Pin Header, pitch 2.54 mm, THT, Vertical, single row, 4p"
  rrect50% 1.6x1.6 hole 1.1: 1(-3.81,0)
  round 1.6 hole 1.1: 2(-1.27,0) 3(1.27,0) 4(3.81,0)
  silkscreen extent -5.23,-1.34 5.23,1.35, body extent -5.08,-1.27 5.08,1.27, height 8.57
61302011821 [mm] "Socket Header, Pitch 2.54 mm, THT, Vertical, single row, 20p"
  rrect50% 1.52x1.52 hole 1.02: 1(-24.13,0)
  round 1.52 hole 1.02: 2(-21.59,0) 3(-19.05,0) 4(-16.51,0) 5(-13.97,0) 6(-11.43,0) 7(-8.89,0) 8(-6.35,0) 9(-3.81,0) 10(-1.27,0) 11(1.27,0) 12(3.81,0) 13(6.35,0) 14(8.89,0) 15(11.43,0) 16(13.97,0) 17(16.51,0) 18(19.05,0) 19(21.59,0) 20(24.13,0)
  silkscreen extent -25.78,-1.35 25.77,1.35, body extent -25.65,-1.25 25.65,1.25, height 8.55
691102710002 [mm] "5,00mm - modular - blue - Horizontal entry with pressure clamp - 9,9 mm height - 02p"
  rrect50% 1.95x1.95 hole 1.3: 1(-2.5,-0.45)
  round 1.95 hole 1.3: 2(2.5,-0.45)
  silkscreen extent -5.6,-3.75 5.6,3.75, body extent -5.6,-3.75 5.6,3.75, height 9.96
"CAP 0603_1608" [mm] "Chip Capacitor, 2-Leads, Body 1.60x0.80mm, IPC Medium Density"
  rect 0.9x1 smd: 1(-0.675,0) 2(0.675,0)
  silkscreen extent -1.4,-0.7 1.4,0.7, body extent -0.8,-0.41 0.8,0.41, height 0.82
"CAP 0805_2012" [mm] "Chip Capacitor, 2-Leads, Body 2.00x1.20mm, IPC Medium Density"
  rect 1.3x1.4 smd: 1(-0.8,0) 2(0.8,0)
  silkscreen extent -1.7,-0.9 1.7,0.9, body extent -1,-0.64 1,0.64, height 1.26
"CAP AL TH D8 L3.5 H12.5" [mm] "8MM Diameter, 3.5MM Lead Spacing Aluminium Capacitor"
  oval 1.5x2 hole 0.8: 1(-1.75,0) 2(1.75,0)
  silkscreen extent -4,-4 4,4, body extent -4,-4 4,4, height 11.5
"CAP POL 2917_7343" [mm] "Molded Capacitor, 2-Leads, Body 7.30x4.30mm, IPC Medium Density"
  rect 2.55x2.45 smd: 1(-3.025,0) 2(3.025,0)
  silkscreen extent -4.58,-2.3 3.8,2.3, body extent -3.65,-2.15 3.65,2.15, height 4.1
"DO214AA SMB" [mm] "Molded Diode, 2-Leads, Body 4.31x3.62mm, IPC Medium Density"
  rect 2.45x2.15 smd: 1(-2.15,0) 2(2.15,0)
  silkscreen extent -3.6,-1.8 3.8,1.8, body extent -2.6,-1.8 2.6,1.8, height 2.4
DO-201AD [mm] "Diode, Axial; Body 9.5 x 5.6 mm (LxDia. max), Lead Dia. 1.32 mm (max)"
  round 2.8 hole 1.7: 1(-6.88,0)
  rect 2.8x2.8 hole 1.7: 2(6.88,0)
  silkscreen extent -4.8,-2.8 4.9,2.8
"FUSR_LITTELFUSE_RHEF100 - duplicate" [mm] "Radial-Leaded PolySwitch® PTC Resettable Fuse, Diameter 9.7mm Width 3mm"
  oval 2.7x3.5 hole 1.7: 1(-5.95,0) 2(2.25,0) 3(-2.25,0) 4(5.95,0)
  silkscreen extent -7.45,-2.4 7.45,2.4, body extent -4.9,-1.57 4.8,1.4, height 13.6
"LED 0603_1608 YELLOW" [mm] "Chip Diode, 2-Leads, Body 1.60x0.80mm, IPC Medium Density"
  rect 0.8x0.8 smd: 1(-0.75,0) 2(0.75,0)
  silkscreen extent -1.52,-0.7 1.52,0.7, body extent -0.8,-0.4 0.8,0.4, height 0.53
modul [mil]
  round 64.96 hole 36: 1(70,590) 2(70,490) 3(70,170) 4(70,70) 5(800,70) 6(800,170) 7(800,490) 8(800,590)
  silkscreen extent 0,0 870,660
MTG240_400#1 [mm] "Plated Through Hole: Hole Dia.=2.4mm Pad Dia.=4.0mm"
  oval 4.5x5.5 hole 3: 1(0,0)
MTG240_400#2 [mm] "Plated Through Hole: Hole Dia.=2.4mm Pad Dia.=4.0mm"
  oval 4.5x5.5 hole 3: 1(0,0.75)
PIN-W2/E2.8 [mm] "Thru-Hole; 2 Leads"
  rect 1.5x1.5 hole 0.9: 1(-5.825,0)
  round 1.5 hole 0.9: 2(5.825,0)
  silkscreen extent -2.65,-1.4 2.65,1.4
"RES 0603_1608" [mm] "Chip Resistor, 2-Leads, Body 1.60x0.80mm, IPC Medium Density"
  rect 0.85x0.95 smd: 1(-0.65,0) 2(0.65,0)
  silkscreen extent -1.27,-0.7 1.27,0.7, body extent -0.8,-0.4 0.8,0.4, height 0.45
"RES 0805_2012" [mm] "Chip Resistor, 2-Leads, Body 2.00x1.25mm, IPC Medium Density"
  rect 1.15x1.35 smd: 1(-0.875,0) 2(0.875,0)
  silkscreen extent -1.7,-0.9 1.7,0.9, body extent -1,-0.62 1,0.63, height 0.6
"RES 2512_6432" [mm] "Chip Resistor, 2-Leads, Body 6.30x3.15mm, IPC Medium Density"
  rect 1.6x3.65 smd: 1(-3.175,0) 2(3.175,0)
  silkscreen extent -4.3,-2.05 4.3,2.05, body extent -3.15,-1.58 3.15,1.57, height 0.7
SOT95P270X145-5N [mil]
  rect 52x22 smd: 1(-54,37) 2(-54,0) 3(-54,-37) 4(54,-37) 5(54,37)
  silkscreen extent -25,49 25,61
SOT95P280X145-6N [mm]
  rrect25% 1.21x0.58 smd: 1(-1.255,0.95) 2(-1.255,0) 3(-1.255,-0.95) 4(1.255,-0.95) 5(1.255,0) 6(1.255,0.95)
  silkscreen extent -2.6,-1.56 0.8,1.56
SOT-23B_N [mm] "SOT23, 3-Leads, Body 2.9x1.3mm, Pitch 0.95mm, Lead Span 2.4mm, IPC Medium Density"
  rect 1.15x0.6 smd: 1(-1.125,0.95) 2(-1.125,-0.95) 3(1.125,0)
  silkscreen extent -1.25,-1.5 0.7,1.93, body extent -0.7,-1.5 0.7,1.5, height 1.14
"ST SOT-223" [mm] "SOT223, 4-Leads, Body 6.50x7.00mm (avg), Pitch 2.30mm, IPC Medium Density"
  rect 2x1.5 smd: 1(-3.15,2.3) 2(-3.15,0) 3(-3.15,-2.3)
  rect 2x3.8 smd: 4(3.15,0)
  silkscreen extent -3.27,-3.35 1.85,3.72, body extent -3.52,-3.25 3.5,3.25, height 1.8
TO-220 [mil]
  rect 65x65 hole 39.4: 1(-100,0)
  round 65 hole 39.4: 2(0,0)
  round 62 hole 39.4: 3(100,0)
  silkscreen extent -200,-75 200,100, body extent -201,-71 201,106, height 869
"VAD USR-ES1 W5500" [mil]
  rect 60x60 hole 36: 1(400,-250) 12(-400,-250)
  round 60 hole 36: 2(400,-150) 3(400,-50) 4(400,50) 5(400,150) 6(400,250) 7(-400,250) 8(-400,150) 9(-400,50) 10(-400,-50) 11(-400,-150)
  silkscreen extent -460,-560 460,480

## Part data
A1.1_M1 A1.1_M2 A1.1_M3 A1.1_M4 A1.2_M1 A1.2_M2 A1.2_M3 A1.2_M4 A2.1_M1 A2.1_M2 A2.1_M3 A2.1_M4 A2.2_M1 A2.2_M2 A2.2_M3 A2.2_M4 K1.1_M1 K1.1_M2 K1.1_M3 K1.1_M4 K1.2_M1 K1.2_M2 K1.2_M3 K1.2_M4 K2.1_M1 K2.1_M2 K2.1_M3 K2.1_M4 K2.2_M1 K2.2_M2 K2.2_M3 K2.2_M4: library part PLATED_HOLE2.4_PAD4.0, "Single Terminal Socket", Author="CERN DEM JMW", Component Type="Standard (No BOM)", ComponentHeight=0mm, CreateDate=10.10.2011, Family="Plated Hole", HelpURL=Undefined, LatestRevisionDate=10.10.2011, Mounted=No, PackageDescription="Plated Through Hole: Hole Dia.=2.4mm Pad Dia.=4.0mm", Part Description="Plated Through Hole: Hole Dia.=2.4mm Pad Dia.=4.0mm", Part Number=PLATED_HOLE2.4_PAD4.0, Pin Count=1, Sense=No, SMD=No, Socket=No, Status=None
C1_M1 C1_M2 C1_M3 C1_M4: library part C0805C225K3PAC7800, "CAP CER 2.2UF 25V X5R 0805", Device Package="0805 (2012 Metric)", Manufacturer=KEMET, Operating Temperature="-55°C ~ 85°C", Supplier Part Number 1=399-11940-1-ND, Temperature Coefficient=X5R, Tolerance=±10%, Voltage - Rated=25V, Applications="General Purpose", Capacitance="2.2 µF", ComponentLink1Description=Datasheet, ComponentLink1URL=https://api.kemet.com/component-edge/download/datasheet/C0805C225K3PAC7800.pdf, ComponentLink2Description="DigiKey Link", ComponentLink2URL=https://www.digikey.com/en/products/detail/kemet/C0805C225K3PAC7800/5267605, LastUpdated="26.02.2022 9:08:50", Lifecycle Status=Active, Minimum Order=1, Mounting Type="Surface Mount, MLCC", Package / Case="0805 (2012 Metric)", Packaging=TapeAndReel, Part Number=C0805C225K3PAC7800, Part Status=Active, PartId=8494, Price=0.04, Series="SMD Comm X5R", Size / Dimension="0.079\" L x 0.049\" W (2.00mm x 1.25mm)", Supplier 1=DigiKey, Thickness (Max)="0.055\" (1.40mm)"
C2_M1 C2_M2 C2_M3 C2_M4 C3_M1 C3_M2 C3_M3 C3_M4 C6 C7 C21 C22: library part CC0603JPX7R9BB102, "CAP CER 1000PF 50V X7R 0603", Device Package="0603 (1608 Metric)", Manufacturer=Yageo, Operating Temperature="-55°C ~ 125°C", Supplier Part Number 1=13-CC0603JPX7R9BB102CT-ND, Temperature Coefficient=X7R, Tolerance=±5%, Voltage - Rated=50V, Applications="General Purpose", Capacitance="1000 pF", ComponentLink1Description=Datasheet, ComponentLink1URL=https://www.yageo.com/upload/media/product/productsearch/datasheet/mlcc/UPY-GPHC_X7R_6.3V-to-50V_20.pdf, ComponentLink2Description="DigiKey Link", ComponentLink2URL=https://www.digikey.com/en/products/detail/yageo/CC0603JPX7R9BB102/11490764, LastUpdated="26.02.2022 9:05:02", Lifecycle Status=Active, Minimum Order=1, Mounting Type="Surface Mount, MLCC", Package / Case="0603 (1608 Metric)", Packaging=TapeAndReel, Part Number=CC0603JPX7R9BB102, Part Status=Active, PartId=35065, Price=0.01, Series=CC, Size / Dimension="0.063\" L x 0.031\" W (1.60mm x 0.80mm)", Supplier 1=DigiKey, Thickness (Max)="0.035\" (0.90mm)"
C4_M1 C4_M2 C4_M3 C4_M4 C5_M1 C5_M2 C5_M3 C5_M4: library part CC0603KRX7R8BB682, "CAP CER 6800PF 25V X7R 0603", Device Package="0603 (1608 Metric)", Manufacturer=Yageo, Operating Temperature="-55°C ~ 125°C", Supplier Part Number 1=311-4090-1-ND, Temperature Coefficient=X7R, Tolerance=±10%, Voltage - Rated=25V, Applications="General Purpose", Capacitance="6800 pF", ComponentLink1Description=Datasheet, ComponentLink1URL=https://www.yageo.com/upload/media/product/productsearch/datasheet/mlcc/UPY-GPHC_X7R_6.3V-to-50V_18.pdf, ComponentLink2Description="DigiKey Link", ComponentLink2URL=https://www.digikey.com/en/products/detail/yageo/CC0603KRX7R8BB682/5883791, LastUpdated="26.02.2022 9:05:31", Lifecycle Status=Active, Minimum Order=1, Mounting Type="Surface Mount, MLCC", Package / Case="0603 (1608 Metric)", Packaging=TapeAndReel, Part Number=CC0603KRX7R8BB682, Part Status=Active, PartId=15819, Price=0.01, Series=CC, Size / Dimension="0.063\" L x 0.031\" W (1.60mm x 0.80mm)", Supplier 1=DigiKey, Thickness (Max)="0.035\" (0.90mm)"
C8 C9 C10 C11 C13 C14 C16 C17: library part CC0603KPX7R8BB104, "CAP CER 0.1UF 25V X7R 0603", Device Package="0603 (1608 Metric)", Manufacturer=Yageo, Operating Temperature="-55°C ~ 125°C", Supplier Part Number 1=13-CC0603KPX7R8BB104CT-ND, Temperature Coefficient=X7R, Tolerance=±10%, Voltage - Rated=25V, Applications="General Purpose", Capacitance="0.1 µF", ComponentLink1Description=Datasheet, ComponentLink1URL=https://www.yageo.com/upload/media/product/productsearch/datasheet/mlcc/UPY-GPHC_X7R_6.3V-to-50V_20.pdf, ComponentLink2Description="DigiKey Link", ComponentLink2URL=https://www.digikey.com/en/products/detail/yageo/CC0603KPX7R8BB104/11491262, LastUpdated="06.03.2022 13:58:12", Lifecycle Status=Active, Minimum Order=1, Mounting Type="Surface Mount, MLCC", Package / Case="0603 (1608 Metric)", Packaging=TapeAndReel, Part Number=CC0603KPX7R8BB104, Part Status=Active, PartId=35805, Price=0.01, Series=CC, Size / Dimension="0.063\" L x 0.031\" W (1.60mm x 0.80mm)", Supplier 1=DigiKey, Thickness (Max)="0.035\" (0.90mm)"
C12 C15: library part ESW227M025AG3AA, "CAP ALUM 220UF 20% 25V RADIAL", Device Package="Radial, Can", ESR (Equivalent Series Resistance)="117mOhm @ 100kHz", Lifetime @ Temp.="4000 Hrs @ 105°C", Manufacturer=KEMET, Operating Temperature="-40°C ~ 105°C", Ripple Current @ High Frequency="640 mA @ 100 kHz", Ripple Current @ Low Frequency="320 mA @ 120 Hz", Supplier Part Number 1=399-6112-ND, Tolerance=±20%, Voltage - Rated="25 V", Applications="General Purpose", Capacitance="220 µF", ComponentLink1Description=Datasheet, ComponentLink1URL=https://api.kemet.com/component-edge/download/datasheet/ESW227M025AG3AA.pdf, ComponentLink2Description="DigiKey Link", ComponentLink2URL=https://www.digikey.com/en/products/detail/kemet/ESW227M025AG3AA/2712542, Height - Seated (Max)="0.492\" (12.50mm)", Impedance="117 mOhms", LastUpdated="11.07.2022 15:34:44", Lead Spacing="0.138\" (3.50mm)", Lifecycle Status=Active, Minimum Order=1, Mounting Type="Through Hole", Package / Case="Radial, Can", Packaging=Bulk, Part Number=ESW227M025AG3AA, Part Status=Active, PartId=7223, Polarization=Polar, Price=0.12, Series=ESW, Size / Dimension="0.315\" Dia (8.00mm)", Supplier 1=DigiKey
C18: library part CL21B105KBFNNNE, "CAP CER 1UF 50V X7R 0805", Device Package="0805 (2012 Metric)", Manufacturer="Samsung Electro-Mechanics", Operating Temperature="-55°C ~ 125°C", Supplier Part Number 1=1276-1029-1-ND, Temperature Coefficient=X7R, Tolerance=±10%, Voltage - Rated=50V, Applications="General Purpose", Capacitance="1 µF", ComponentLink1Description=Datasheet, ComponentLink1URL=http://www.samsungsem.com/kr/support/product-search/mlcc/CL21B105KBFNNNE.jsp, ComponentLink2Description="DigiKey Link", ComponentLink2URL=https://www.digikey.com/en/products/detail/samsung-electro-mechanics/CL21B105KBFNNNE/3886687, LastUpdated="27.06.2022 11:05:28", Lifecycle Status=Active, Minimum Order=1, Mounting Type="Surface Mount, MLCC", Package / Case="0805 (2012 Metric)", Packaging=TapeAndReel, Part Number=CL21B105KBFNNNE, Part Status=Active, PartId=39620, Price=0.02, Series=CL, Size / Dimension="0.079\" L x 0.049\" W (2.00mm x 1.25mm)", Supplier 1=DigiKey, Thickness (Max)="0.053\" (1.35mm)"
C19: library part 08056D475KAT2A, "CAP CER 4.7UF 6.3V X5R 0805", Device Package="0805 (2012 Metric)", Manufacturer="AVX Corporation", Operating Temperature="-55°C ~ 85°C", Supplier Part Number 1=478-1416-1-ND, Temperature Coefficient=X5R, Tolerance=±10%, Voltage - Rated=6.3V, Applications="General Purpose", Capacitance=4.7µF, ComponentLink1Description=Datasheet, ComponentLink1URL=http://datasheets.avx.com/cx5r.pdf, ComponentLink2Description="DigiKey Link", ComponentLink2URL=http://digikey.com/product-detail/en/avx-corporation/08056D475KAT2A/478-1416-1-ND/564448, LastUpdated="02.09.2020 1:04:16", Lifecycle Status=Active, Minimum Order=1, Mounting Type="Surface Mount, MLCC", Package / Case="0805 (2012 Metric)", Packaging=TapeAndReel, Part Number=08056D475KAT2A, Part Status=Active, PartId=15246, Price=0.13, Series=-, Size / Dimension="0.079\" L x 0.049\" W (2.01mm x 1.25mm)", Supplier 1=DigiKey, Thickness (Max)="0.055\" (1.40mm)"
C20: library part CS0603KRX7R7BB104, "CAP CER 0.1UF 16V X7R 0603", Device Package="0603 (1608 Metric)", Manufacturer=Yageo, Operating Temperature="-55°C ~ 125°C", Supplier Part Number 1=311-3560-1-ND, Temperature Coefficient=X7R, Tolerance=±10%, Voltage - Rated=16V, Applications="Boardflex Sensitive", Capacitance="0.1 µF", ComponentLink1Description=Datasheet, ComponentLink1URL=http://www.yageo.com/NewPortal/yageodocoutput?fileName=/pdf/MLCC/UPY-ST_NPOX7R_16V-to-3KV_5.pdf, ComponentLink2Description="DigiKey Link", ComponentLink2URL=https://www.digikey.com/en/products/detail/yageo/CS0603KRX7R7BB104/6097897, Features="Soft Termination", LastUpdated="30.06.2022 22:03:44", Lifecycle Status=Active, Minimum Order=1, Mounting Type="Surface Mount, MLCC", Package / Case="0603 (1608 Metric)", Packaging=TapeAndReel, Part Number=CS0603KRX7R7BB104, Part Status=Active, PartId=2286, Price=0.02, Series=CS, Size / Dimension="0.063\" L x 0.031\" W (1.60mm x 0.80mm)", Supplier 1=DigiKey, Thickness (Max)="0.037\" (0.95mm)"
C23: library part ESH477M010AG3AA, "CAP ALUM 470UF 20% 10V RADIAL", Lifetime @ Temp.="2000 Hrs @ 105°C", Manufacturer=KEMET, Operating Temperature="-40°C ~ 105°C", Ripple Current @ High Frequency="457.5 mA @ 10 kHz", Ripple Current @ Low Frequency="305 mA @ 120 Hz", Supplier Part Number 1=399-ESH477M010AG3AA-ND, Tolerance=±20%, Voltage - Rated="10 V", Applications="General Purpose", Capacitance="470 µF", ComponentLink1Description=Datasheet, ComponentLink1URL=https://api.kemet.com/component-edge/download/datasheet/ESH477M010AG3AA.pdf, ComponentLink2Description="DigiKey Link", ComponentLink2URL=https://www.digikey.com/en/products/detail/kemet/ESH477M010AG3AA/13176193, Height - Seated (Max)="0.492\" (12.50mm)", LastUpdated="11.07.2022 15:34:42", Lead Spacing="0.138\" (3.50mm)", Lifecycle Status=Active, Minimum Order=1, Mounting Type="Through Hole", Packaging=Box, Part Number=ESH477M010AG3AA, Part Status=Active, PartId=27002, Polarization=Polar, Price=0.08, Series=ESH, Size / Dimension="0.315\" Dia (8.00mm)", Supplier 1=DigiKey
C24: library part T530X337M010AHE010, "CAP TANT POLY 330UF 10V 2917", Device Package="2917 (7343 Metric)", ESR (Equivalent Series Resistance)="10mOhm @ 100kHz", Lifetime @ Temp.="2000 Hrs @ 105°C", Manufacturer=KEMET, Manufacturer Size Code=X, Operating Temperature="-55°C ~ 125°C", Supplier Part Number 1=399-10377-1-ND, Tolerance=±20%, Voltage - Rated=10V, Capacitance=330µF, ComponentLink1Description=Datasheet, ComponentLink1URL=https://content.kemet.com/datasheets/KEM_T2076_T52X-530.pdf, ComponentLink2Description="DigiKey Link", ComponentLink2URL=http://digikey.com/product-detail/en/kemet/T530X337M010AHE010/399-10377-1-ND/3760458, Features="General Purpose", Height - Seated (Max)="0.169\" (4.30mm)", LastUpdated="02.09.2020 1:16:50", Lifecycle Status=Active, Minimum Order=1, Mounting Type="Surface Mount", Package / Case="2917 (7343 Metric)", Packaging=TapeAndReel, Part Number=T530X337M010AHE010, Part Status=Active, PartId=825, Price=3.55, Series="KO-CAP® T530", Size / Dimension="0.287\" L x 0.169\" W (7.30mm x 4.30mm)", Supplier 1=DigiKey, Type=Molded
D1_M1 D1_M2 D1_M3 D1_M4 D2_M1 D2_M2 D2_M3 D2_M4: library part XZM2CYK53W-1, "LED YELLOW CLEAR 2SMD", Current - Test=20mA, Device Package="0603 (1608 Metric)", Lens Color=Colorless, Manufacturer=SunLED, Millicandela Rating=317mcd, Supplier Device Package=2-SMD, Supplier Part Number 1=1497-1236-1-ND, Voltage - Forward (Vf) (Typ)=2V, Color=Yellow, ComponentLink1Description=Datasheet, ComponentLink1URL=https://www.sunledusa.com/products/spec/XZM2CYK53W-1.pdf, ComponentLink2Description="DigiKey Link", ComponentLink2URL=http://digikey.com/product-detail/en/sunled/XZM2CYK53W-1/1497-1236-1-ND/5001283, Configuration=Standard, Height (Max)=0.75mm, LastUpdated="02.09.2020 1:21:18", Lens Size="1.10mm x 0.80mm", Lens Style="Rectangle with Flat Top", Lens Transparency=Clear, Lifecycle Status=Active, Minimum Order=1, Mounting Type="Surface Mount", Package / Case="0603 (1608 Metric)", Packaging=TapeAndReel, Part Number=XZM2CYK53W-1, Part Status=Active, PartId=102, Price=0.15, Series=-, Size / Dimension="1.60mm L x 0.80mm W", Supplier 1=DigiKey, Viewing Angle=120°, Wavelength - Dominant=590nm, Wavelength - Peak=590nm
D4: "3 Amp General Purpose Rectifier", ComponentLink1Description="Manufacturer Link", ComponentLink1URL=http://www.fairchildsemi.com/, ComponentLink2Description=Datasheet, ComponentLink2URL=http://www.fairchildsemi.com/ds/1N%2F1N5400.pdf, DatasheetVersion=1998, LatestRevisionDate=17-Jul-2002, LatestRevisionNote="Re-released for DXP Platform.", PackageDescription="Diode, Axial; Body 9.5 x 5.6 mm (LxDia. max), Lead Dia. 1.32 mm (max)", PackageReference=DO-201AD, PackageVersion=Aug-1999, Published=8-Jun-2000, Publisher="Altium Limited"
D5: "TVS DIODE 120VWM 193VC DO214AA", Current - Peak Pulse (10/1000µs)=3.1A, Manufacturer="Taiwan Semiconductor Corporation", Operating Temperature="-55°C ~ 150°C (TJ)", Package / Case="DO-214AA, SMB", Power - Peak Pulse=600W, Power Line Protection=No, Supplier Device Package="DO-214AA (SMB)", Supplier Part Number 1=SMBJ120AFSCT-ND, Voltage - Breakdown (Min)=133V, Voltage - Clamping (Max) @ Ipp=193V, Voltage - Reverse Standoff (Typ)=120V, Applications="General Purpose", ComponentLink1Description=Datasheet, ComponentLink1URL=https://www.taiwansemi.com/products/datasheet/SMBJ%20SERIES_P1812.pdf, ComponentLink2Description="DigiKey Link", ComponentLink2URL=https://www.digikey.com/en/products/detail/taiwan-semiconductor-corporation/SMBJ120A/1049541, LastUpdated="11.07.2022 15:29:50", Lifecycle Status=Active, Minimum Order=1, Mounting Type="Surface Mount", Packaging=TapeAndReel, Part Number=SMBJ120A, Part Status=Active, PartId=10713, Price=0.26, Series=SMBJ, Supplier 1=DigiKey, Type=Zener, Unidirectional Channels=1
F1: "Fuse", LatestRevisionDate=17-Jul-2002, LatestRevisionNote="Re-released for DXP Platform.", PackageDescription="Thru-Hole; 2 Leads", PackageReference=PIN-W2/E2.8, Published=8-Jun-2000, Publisher="Altium Limited"
F1_M1 F1_M2 F1_M3 F1_M4 F2_M1 F2_M2 F2_M3 F2_M4: library part Fuse_auto, "Fuse"
IC1: library part LD1117AS33TR, "IC REG LINEAR 3.3V 1A SOT223", Current - Output=1A, Current - Quiescent (Iq)="10 mA", Manufacturer=STMicroelectronics, Operating Temperature="0°C ~ 125°C", Package / Case="TO-261-4, TO-261AA", Supplier Device Package=SOT-223, Supplier Part Number 1=497-1228-1-ND, Voltage - Input (Max)=15V, Voltage - Output (Min/Fixed)=3.3V, Voltage Dropout (Max)="1.3V @ 1A", ComponentLink1Description=Datasheet, ComponentLink1URL=http://www.st.com/content/ccc/resource/technical/document/datasheet/a5/c3/3f/c9/2b/15/40/49/CD00002116.pdf/files/CD00002116.pdf/jcr:content/translations/en.CD00002116.pdf, ComponentLink2Description="DigiKey Link", ComponentLink2URL=https://www.digikey.com/en/products/detail/stmicroelectronics/LD1117AS33TR/585752, LastUpdated="27.06.2022 11:57:05", Lifecycle Status=Active, Minimum Order=1, Mounting Type="Surface Mount", Number of Regulators=1, Output Configuration=Positive, Output Type=Fixed, Packaging=TapeAndReel, Part Number=LD1117AS33TR, Part Status=Active, Price=0.45, Protection Features="Over Current, Over Temperature", PSRR="75dB (120Hz)", Series=-, Supplier 1=DigiKey
J1 J2: "WR-PHD Socket Header, THT, pitch 2.54mm, Single Row, Vertical, 20p", Contact Resistance=20mOhm, Manufacturer="Wurth Elektronik", Operating Temperature="-40 to +125degC", Rated Current=3A, Withstanding Voltage=500VAC, Working Voltage=250VAC, ComponentLink1Description=Manufacturer, ComponentLink1URL=http://www.we-online.de, ComponentLink2Description=Datasheet, ComponentLink2URL=https://www.we-online.com/catalog/datasheet/61302011821.pdf, Gender="Socket Header", Manufacturer Part Number=61302011821, Mounting Technology=THT, Orientation=Vertical, Packaging=Tray, Pin Number=20, Pitch=2.54mm, Row Number=Single
J4: "WR-TBL Serie 102 Horizontal Entry Modular, Pressure Clamp, THT, pitch 5mm, 2p", Manufacturer="Wurth Elektronik", Operating Temperature="-40 to +105degC", Rated Current [UL]=15A, Working Voltage [UL]=250VAC, Application="Pressure Clamp", ComponentLink1Description=Manufacturer, ComponentLink1URL=http://www.we-online.de, ComponentLink2Description=Datasheet, ComponentLink2URL=https://katalog.we-online.de/em/datasheet/691102710002.pdf, Manufacturer Part Number=691102710002, Modularity=Yes, Mounting Technology=THT, Packaging=Box, PCB/Cable/Panel=PCB, Pin Number=2, Pitch=5mm, Published Date="Feburary 2021", Type=Horizontal
P1: "WR-PHD Pin Header, THT, pitch 2.54mm, Single Row, Vertical, 4p", Contact Resistance=20mOhm, Manufacturer="Wurth Elektronik", Operating Temperature="-40 to +105degC", Rated Current=3A, Withstanding Voltage=500VAC, Working Voltage=250VAC, ComponentLink1Description=Manufacturer, ComponentLink1URL=http://www.we-online.de, ComponentLink2Description=Datasheet, ComponentLink2URL=https://www.we-online.com/catalog/datasheet/61300411121.pdf, Gender="Pin Header", Manufacturer Part Number=61300411121, Mounting Technology=THT, Orientation=Vertical, Packaging=Bag, Pin Number=4, Pitch=2.54mm, Row Number=Single